# Altium PCB relays.PcbDoc
Units mm, origin at the board's own origin, x right, y up, seen from the top; angles counter-clockwise.
Board outline 114.2 x 71.2 mm, 2 copper layers (Top Layer, Bottom Layer); 37 components, 53 nets, 210 pads, 22 vias.
Unrouted connection lines stored in the file: 26.
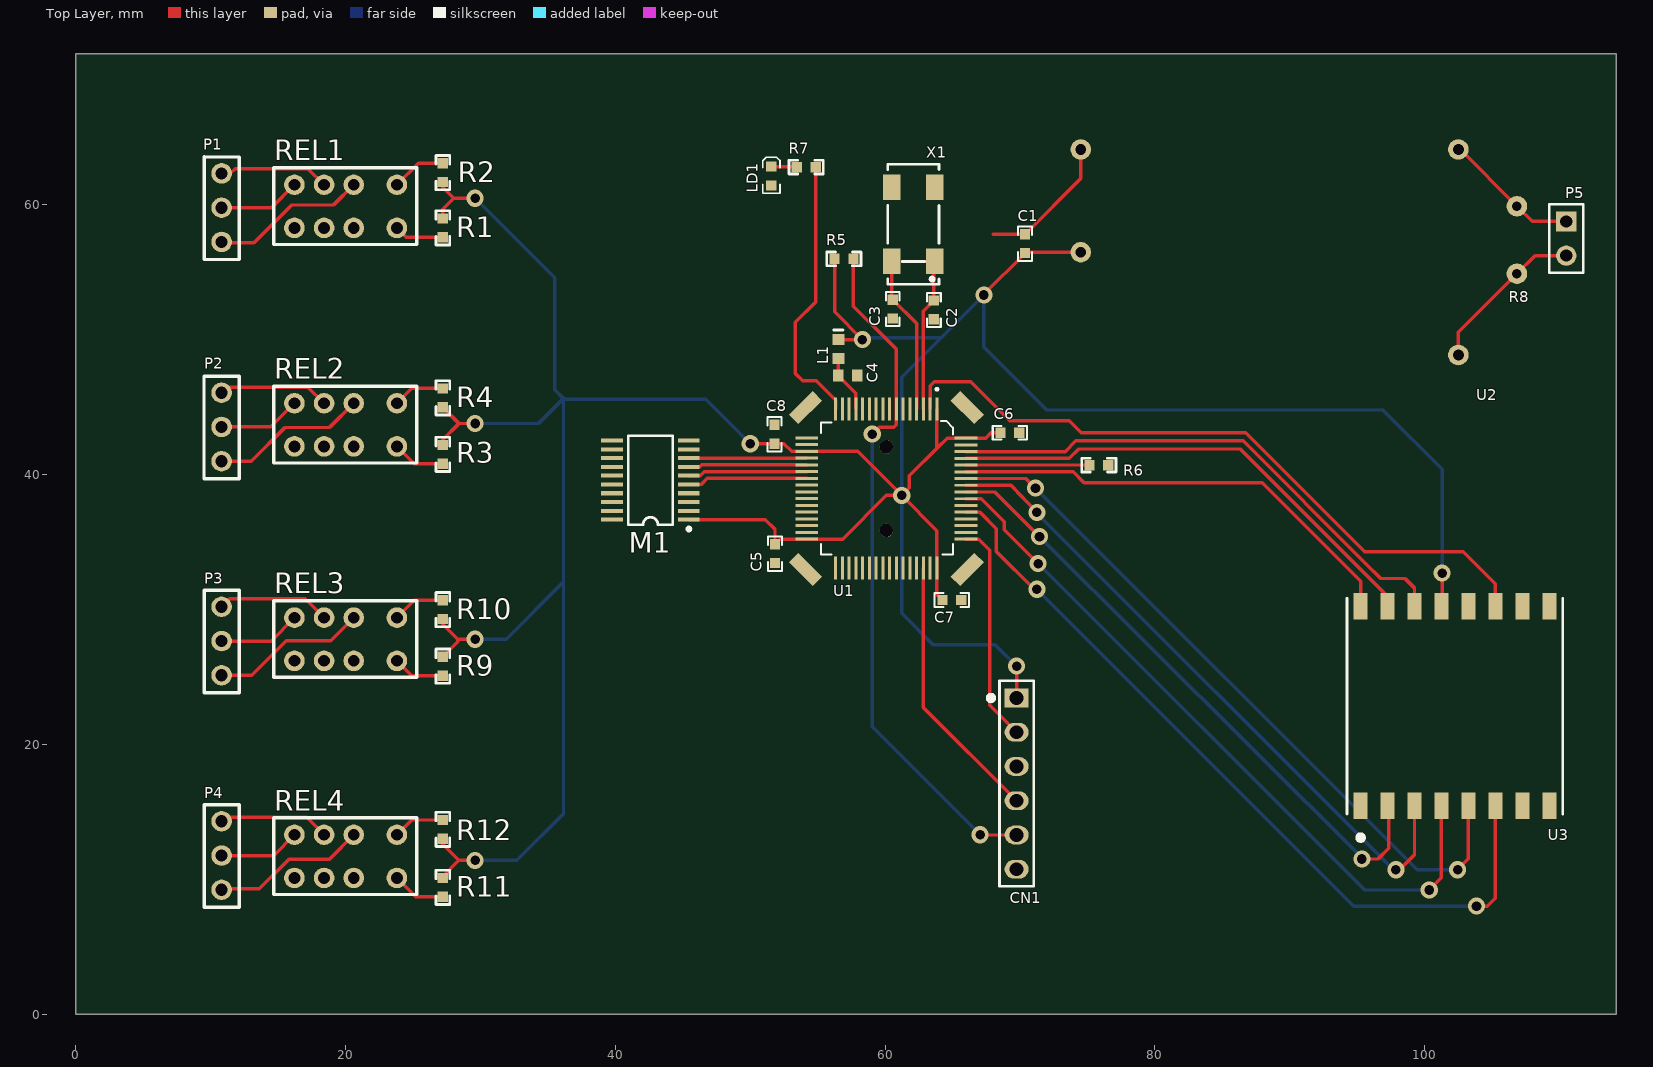
[diagram p0: Top Layer view]
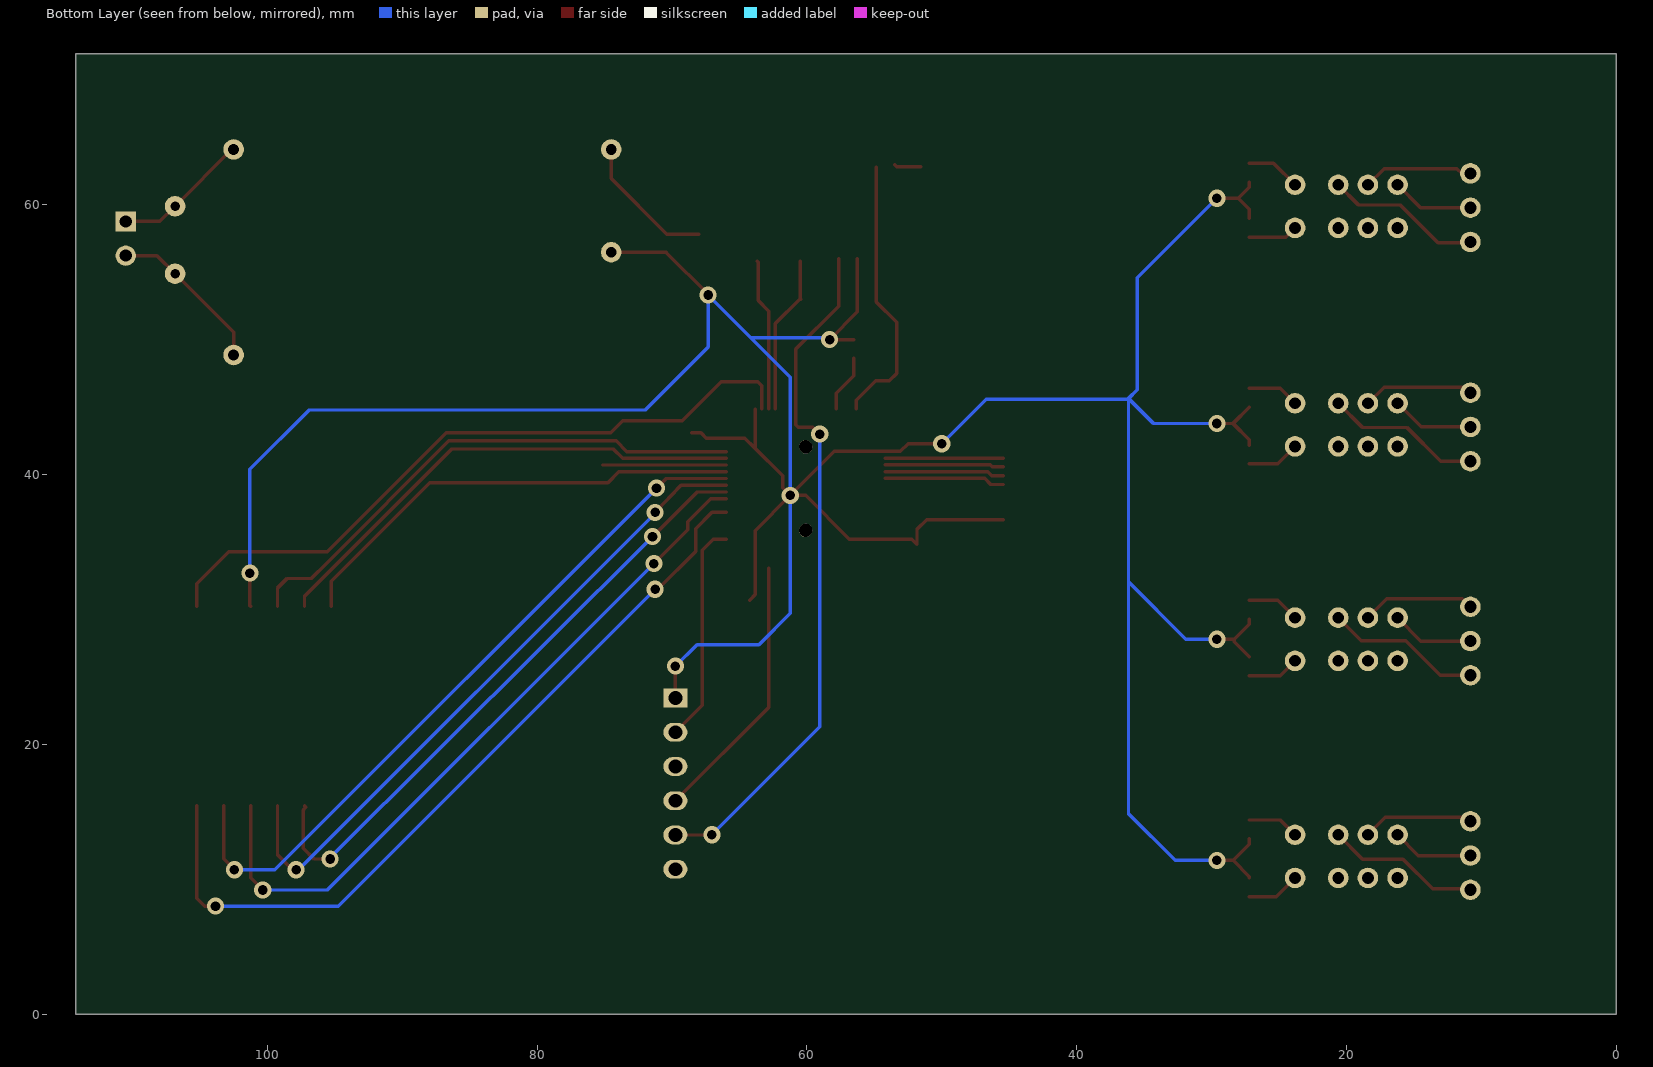
[diagram p1: Bottom Layer view, seen from below]

## Layer stack, top to bottom
Top Solder: solder mask 0.0102, Solder Resist, Dk 3.5
Top Layer: signal copper 0.0356
Dielectric 1: dielectric 0.32, FR-4, Dk 4.8
Bottom Layer: signal copper 0.0356
Bottom Solder: solder mask 0.0102, Solder Resist, Dk 3.5

## Board outline
0,0 114.2,0 114.2,71.2 0,71.2

## Design rules (kind name [scope] priority, off if disabled: settings)
Clearance [All] p1: gap=0.254 ignorepadtopadclearanceinfootprint=FALSE except(0: Arc-Hole Track-Hole SMDPad-Hole THPad-Hole Via-Hole Fill-Hole Poly-Hole Region-Hole Text-Hole; 0.24: Arc-Arc Arc-Track Track-Track)
PolygonConnect [All] p1: connectstyle=Relief reliefconductorwidth=0.254 reliefentries=4 polygonreliefangle="90 Angle" airgapwidth=0.254
RoutingVias [All] p1: holewidth=0.711 width=1.27 viastyle="Through Hole" minholewidth=0.711 minwidth=1.27 maxholewidth=0.711 maxwidth=1.27
SolderMaskExpansion [All] p1: expansion=0.102
Width Width_Power [(InNet('GND') AND InNet('VDD'))] p1: maxlimit=0.5 minlimit=0.25 preferedwidth=0.5
Width [All] p2: maxlimit=0.254 minlimit=0.254 preferedwidth=0.254
30 further rules are at their usual default settings.

## Components (designator, comment, footprint, x,y, rotation, side; value= is the part's Value field where it differs from the comment)
C1 "100nF" 0603C 70.377,57.133 r270 top value=10nF
C2 "10pF[N/A]" 0603C 63.616,52.218 r90 top
C3 "10pF[N/A]" 0603C 60.568,52.282 r90 top
C4 "Cap Semi" 1608[0603] 57.231,47.354 r0 top value=100nF
C5 "100nF" 0603C 51.835,34.146 r90 top value=10nF
C6 "100nF" 0603C 69.252,43.106 r180 top value=10nF
C7 "100nF" 0603C 64.949,30.706 r180 top value=10nF
C8 "100nF" 0603C 51.8,43 r270 top value=10nF
CN1 "Header 6X1" 1*6P 69.75,23.446 r270 top
L1 "Bead" INDC1608L 56.534,49.324 r270 top value=10mH
LD1 "Green" 0603D 51.567,62.149 r90 top
M1 "MAX4821" TSSOP20 42.6,39.6 r90 top
P1 "relay_header_3" relay_header_3 10.8,57.26 r90 top
P2 "relay_header_3" relay_header_3 10.798,41.002 r90 top
P3 "relay_header_3" relay_header_3 10.8,25.126 r90 top
P4 "relay_header_3" relay_header_3 10.8,9.22 r90 top
P5 "Header 2" HDR1X2 110.509,58.784 r270 top
R1 "50" 0603R 27.2,58.3 r90 top value=1K
R2 "50" 0603R 27.2,62.4 r270 top value=1K
R3 "50" 0603R 27.2,41.501 r90 top value=1K
R4 "50" 0603R 27.2,45.7 r270 top value=1K
R5 "4K7" 0603R 56.95,56.006 r0 top value=1K
R6 "4K7" 0603R 75.85,40.706 r0 top value=1K
R7 "510" 0603R 54.15,62.806 r0 top value=1K
R8 "" varistor 106.85,59.906 r270 top value=1K
R9 "50" 0603R 27.2,25.8 r90 top value=1K
R10 "50" 0603R 27.2,30 r270 top value=1K
R11 "50" 0603R 27.2,9.4 r90 top value=1K
R12 "50" 0603R 27.2,13.7 r270 top value=1K
REL1 "AGN21003" AGN21003 23.8,58.3 r180 top
REL2 "AGN21003" AGN21003 23.8,42.1 r180 top
REL3 "AGN21003" AGN21003 23.8,26.2 r180 top
REL4 "AGN21003" AGN21003 23.8,10.1 r180 top
U1 "MCU_LQFP64" LQFP64 60.09,38.972 r180 top
U2 "RAC02-05SGA" RAC02-05SGA 102.508,48.878 r180 top
U3 "RFM95W-868S2" XCVR_RFM95W-868S2 102.254,22.843 r90 top
X1 "32.768K[N/A]" XTAL_4SM_8X3R8 62.092,58.568 r90 top

## Footprints (in the part's own frame and the unit in brackets; to place one, negate y for a bottom-side part, rotate by r counter-clockwise, add the part's x,y. Pads: shape width x height; smd on the part's side, far side on the other; paste and mask are expansions set on the pad)
1*6P [mil]
  rect 55x70 hole 40: 1(0,0)
  oval 55x70 hole 40: 2(100,0) 3(200,0) 4(300,0) 5(400,0) 6(500,0)
  silkscreen extent -50,-82 550,50
0603C [mil]
  rect 30x30 smd: 1(27.5,0) 2(-27.5,0)
  silkscreen extent -50,-20 50,20
0603D [mil]
  rect 30x30 smd: 1(27.5,0) 2(-27.5,0)
  silkscreen extent -50,-25 55,25
0603R [mil]
  rect 30x30 smd: 1(27.5,0) 2(-27.5,0)
  silkscreen extent -50,-20 50,20
1608[0603] [mm] "Chip Capacitor, Body 1.6x0.8mm, IPC High Density"
  rect 0.8x0.9 smd: 1(-0.7,0) 2(0.7,0)
  body extent -0.87,-0.48 0.87,0.48, height 1.3
AGN21003 [mm] "Single coil latching DPDT relay"
  round 1.524 hole 0.87: 1(0,0) 2(3.2,0) 3(5.4,0) 4(7.6,0) 5(7.6,-3.2) 6(5.4,-3.2) 7(3.2,-3.2) 8(0,-3.2)
  silkscreen extent -1.48,-4.47 9.12,1.23
HDR1X2 [mm] "Connector; Header; 2 Position"
  rect 1.5x1.5 hole 0.9: 1(0,0)
  round 1.5 hole 0.9: 2(2.54,0)
  silkscreen extent -1.27,-1.27 3.81,1.27
INDC1608L [mm] "Chip Inductor, Body 1.6x0.8mm, IPC High Density"
  rect 0.8x0.9 smd: 1(-0.7,0) 2(0.7,0)
  silkscreen extent -1.4,-0.35 -1.4,0.35, body extent -0.87,-0.48 0.87,0.48, height 0.55
LQFP64 [mm]
  rect 1x2.5 smd rot 135: 0(-6,6) 0(6,-6)
  rect 1x2.5 smd rot 45: 0(-6,-6) 0(6,6)
  round 1 hole 1 unplated: 0(0,3.1) 0(0,-3.1)
  rect 0.22x1.7 smd: 1(-3.747,-5.901) 2(-3.247,-5.901) 3(-2.747,-5.901) 4(-2.247,-5.901) 5(-1.747,-5.901) 6(-1.247,-5.901) 7(-0.747,-5.901) 8(-0.247,-5.901) 9(0.253,-5.901) 10(0.753,-5.901) 11(1.253,-5.901) 12(1.753,-5.901) 13(2.253,-5.901) 14(2.753,-5.901) 15(3.253,-5.901) 16(3.753,-5.901) 33(3.753,5.902) 34(3.253,5.902) 35(2.753,5.902) 36(2.253,5.902) 37(1.753,5.902) 38(1.253,5.902) 39(0.753,5.902) 40(0.253,5.902) 41(-0.247,5.902) 42(-0.747,5.902) 43(-1.247,5.902) 44(-1.747,5.902) 45(-2.247,5.902) 46(-2.747,5.902) 47(-3.247,5.902) 48(-3.747,5.901)
  rect 1.7x0.22 smd: 17(5.901,-3.753) 18(5.901,-3.253) 19(5.901,-2.753) 20(5.901,-2.253) 21(5.901,-1.753) 22(5.901,-1.253) 23(5.901,-0.753) 24(5.901,-0.253) 25(5.901,0.247) 26(5.901,0.747) 27(5.901,1.247) 28(5.901,1.747) 29(5.901,2.247) 30(5.901,2.747) 31(5.901,3.247) 32(5.901,3.747) 49(-5.902,3.753) 50(-5.902,3.253) 51(-5.902,2.753) 52(-5.902,2.253) 53(-5.902,1.753) 54(-5.902,1.253) 55(-5.902,0.753) 56(-5.902,0.253) 57(-5.902,-0.247) 58(-5.902,-0.747) 59(-5.902,-1.247) 60(-5.902,-1.747) 61(-5.902,-2.247) 62(-5.902,-2.746) 63(-5.902,-3.246) 64(-5.902,-3.746)
  silkscreen extent -4.94,-7.42 4.84,4.89
RAC02-05SGA [mil] "AC/DC converter"
  round 60 hole 31.5: 1(0,0) 2(0,-600) 3(1102.36,-600) 4(1102.36,-300)
relay_header_3 [mil]
  round 60 hole 35.43: 1(0,0) 2(200,0) 3(100,0)
  silkscreen extent -51,-51 249,51
TSSOP20 [mm] "Shrink Small Outline; 20 Leads; Body Width 4.4 mm; Pitch 0.65 mm"
  rect 0.3x1.6 smd: 1(-2.925,-2.85) 2(-2.275,-2.85) 3(-1.625,-2.85) 4(-0.975,-2.85) 5(-0.325,-2.85) 6(0.325,-2.85) 7(0.975,-2.85) 8(1.625,-2.85) 9(2.275,-2.85) 10(2.925,-2.85) 11(2.925,2.85) 12(2.275,2.85) 13(1.625,2.85) 14(0.975,2.85) 15(0.325,2.85) 16(-0.325,2.85) 17(-0.975,2.85) 18(-1.625,2.85) 19(-2.275,2.85) 20(-2.925,2.85)
  silkscreen extent -3.75,-2.97 3.3,1.65
varistor [mil]
  round 60 hole 27.56: 1(0,0) 2(196.85,0)
XCVR_RFM95W-868S2 [mm]
  rect 1.95x1.05 smd: 1(-7.4,7) 2(-7.4,5) 3(-7.4,3) 4(-7.4,1) 5(-7.4,-1) 6(-7.4,-3) 7(-7.4,-5) 8(-7.4,-7) 9(7.4,-7) 10(7.4,-5) 11(7.4,-3) 12(7.4,-1) 13(7.4,1) 14(7.4,3) 15(7.4,5) 16(7.4,7)
  silkscreen extent -10.04,-8 8,8
XTAL_4SM_8X3R8 [mm]
  rect 1.9x1.3 smd: 1(-2.75,-1.6) 2(2.75,-1.6) 3(2.75,1.6) 4(-2.75,1.6)
  silkscreen extent -4.44,-1.91 4.44,1.91

## Part data
C1 C2 C5 C6 C7 C8: library part Cap, "Capacitor"
  C1 C5 C6 C7 C8: Published=8-Jun-2000, Publisher="Altium Limited", Revision="July-2002: Re-released for DXP Platform."
C3: library part CAP, "Capacitor"
C4: "Capacitor (Semiconductor SIM Model)", LatestRevisionDate=29-May-2009, LatestRevisionNote="IPC-7351 Footprint Added.", PackageDescription="Chip Capacitor", PackageReference=C1206, Published=8-Jun-2000, Publisher="Altium Limited"
CN1: "Header, 6-Pin, Single row", LatestRevisionDate=17-Jul-2002, LatestRevisionNote="Re-released for DXP Platform.", Publisher="Altium Limited"
L1: library part Inductor, "Inductor", Code_IEC=1005, Code_JEITA=0402, LatestRevisionDate=29-May-2009, LatestRevisionNote="IPC-7351 Footprint Added.", PackageDescription="Chip Inductor", PackageReference=0402-A, Published=8-Jun-2000, Publisher="Altium Limited"
LD1: library part LED2, "Typical RED, GREEN, YELLOW, AMBER GaAs LED", Published=8-Jun-2000, Publisher="Altium Limited", Revision="July-2002: Re-released for DXP Platform."
P5: "Header, 2-Pin", LatestRevisionDate=17-Jul-2002, LatestRevisionNote="Re-released for DXP Platform.", Publisher="Altium Limited"
R1 R2 R3 R4 R5 R6 R7 R8 R9 R10 R11 R12: library part Res1, "Resistor", Published=8-Jun-2000, Publisher="Altium Limited", Revision="July-2002: Re-released for DXP Platform."
U2: "AC/DC converter"
U3: Package="SMD-16 Hope Microelectronics", Availability=Warning, MF="Hope Microelectronics", MP=RFM95W-868S2, Price="8.44 USD"
X1: library part MC306

## Via types
v1: diameter 1.27, hole 0.711, Top Layer to Bottom Layer, 22 vias

## Nets (pads, with @x,y where several pads share a name; then routed paths per layer and width w, separated by ;. In a path a pad name is that pad's centre, name@x,y a point inside that pad or via, vN(x,y) a via of type N, cw(c..) or ccw(c..) an arc to the next point about the centre after c; other vN are vias at no path point)
GND: C1.2 C2.2 C3.2 C4.2 C5.2 C6.2 C7.2 C8.2 CN1.3 LD1.2 M1.9 M1.12 M1.18 R6.1 U1.12 U1.18 U1.31 U1.47 U1.63 U2.3 U3.1 U3.8 U3.10 | length 10.3
  Top Layer w0.254: 68.028,57.832 C1.2 74.508,61.963 U2.3
NetC2_1: C2.1 U1.3 X1.1 | length 11.3
  Top Layer w0.254: U1.3 62.837,52.137 C2.1 63.616,55.742 X1.1
NetC3_1: C3.1 U1.4 X1.4 | length 11.7
  Top Layer w0.254: C3.1@60.455,53.019 60.492,53.056 X1.4 ; C3.1 62.337,51.211 U1.4
NetC4_1: C4.1 L1.2 U1.13 | length 4.3
  Top Layer w0.254: L1.2 56.531,48.621 C4.1 57.837,46.048 U1.13
NetLD1_1: LD1.1 R7.2 | length 2
  Top Layer w0.254: LD1.1 53.345,62.848 R7.2@53.472,62.975
NetM1_5: M1.5 U1.23 | length 8.9
  Top Layer w0.254: M1.5 46.375,39.275 46.825,39.725 U1.23
NetM1_6: M1.6 U1.22 | length 8.9
  Top Layer w0.254: M1.6 46.3,39.925 46.6,40.225 U1.22
NetM1_7: M1.7 U1.21 | length 8.8
  Top Layer w0.254: M1.7 46.251,40.575 46.402,40.725 U1.21
NetM1_8: M1.8 U1.20 | length 8.7
  Top Layer w0.254: M1.8@45.45,41.225 U1.20
NetM1_16: M1.16 R11.2 REL4.1 | length 4
  Top Layer w0.254: REL4.1 25.198,8.701 R11.2
NetM1_17: M1.17 R9.2 REL3.1 | length 3.9
  Top Layer w0.254: REL3.1 24.898,25.101 R9.2
NetM1_19: M1.19 R3.2 REL2.1 | length 3.9
  Top Layer w0.254: REL2.1 25.097,40.803 R3.2
NetM1_20: M1.20 R1.2 REL1.1 | length 3.7
  Top Layer w0.254: REL1.1 24.499,57.602 R1.2
NetP1_1: P1.1 REL1.7 | length 11.6
  Top Layer w0.254: P1.1 10.86,57.2 13.2,57.2 16,60 19.1,60 REL1.7
NetP1_2: P1.2 REL1.6 | length 8.6
  Top Layer w0.254: P1.2@11.034,62.106 P1.2 11.44,62.34 11.8,62.7 17.2,62.7 REL1.6
NetP1_3: P1.3 REL1.5 | length 6.1
  Top Layer w0.254: P1.3 14.5,59.8 REL1.5
NetP2_1: P2.1 REL2.7 | length 11.8
  Top Layer w0.254: P2.1@10.673,40.877 P2.1 13.002,41.002 15.5,43.5 18.8,43.5 REL2.7
NetP2_2: P2.2 REL2.6 | length 8.4
  Top Layer w0.254: P2.2@10.673,45.957 P2.2 11.216,46.5 17.2,46.5 REL2.6
NetP2_3: P2.3 REL2.5 | length 6.1
  Top Layer w0.254: P2.3 14.441,43.542 REL2.5
NetP3_1: P3.1 REL3.7 | length 11.6
  Top Layer w0.254: P3.1 13.026,25.126 15.6,27.7 18.9,27.7 REL3.7
NetP3_2: P3.2 REL3.6 | length 8.8
  Top Layer w0.254: P3.2@10.55,30.386 10.73,30.206 P3.2 11.394,30.8 17,30.8 REL3.6
NetP3_3: P3.3 REL3.5 | length 6.1
  Top Layer w0.254: P3.3 14.466,27.666 REL3.5
NetP4_1: P4.1 REL4.7 | length 11.8
  Top Layer w0.254: P4.1@10.55,9.026 10.83,9.306 13.606,9.306 15.8,11.5 18.8,11.5 REL4.7
NetP4_2: P4.2 REL4.6 | length 8.3
  Top Layer w0.254: P4.2 11.1,14.6 17.1,14.6 REL4.6
NetP4_3: P4.3 REL4.5 | length 6
  Top Layer w0.254: P4.3 14.66,11.76 REL4.5
NetP5_1: P5.1 R8.1 U2.2 | length 10.4
  Top Layer w0.254: U2.2@102.508,63.928 U2.2 102.638,64.118 R8.1 107.972,58.784 P5.1
NetP5_2: P5.2 R8.2 U2.1 | length 12
  Top Layer w0.254: U2.1 102.508,50.564 R8.2 108.188,56.244 P5.2
NetR2_2: R2.2 REL1.8 | length 4.1
  Top Layer w0.254: REL1.8 25.398,63.098 R2.2
NetR4_2: R4.2 REL2.8 | length 3.9
  Top Layer w0.254: REL2.8 24.898,46.399 R4.2
NetR6_2: R6.2 U1.60 | length 9.2
  Top Layer w0.254: U1.60 R6.2@75.152,40.719
NetR10_2: R10.2 REL3.8 | length 3.9
  Top Layer w0.254: REL3.8 25.099,30.699 R10.2
NetR12_2: R12.2 REL4.8 | length 3.9
  Top Layer w0.254: REL4.8 24.898,14.399 R12.2
NRST: CN1.5 R5.1 U1.7 | length 51.4
  Top Layer w0.254: R5.1 57.649,52.507 60.837,49.319 U1.7 60.837,43.693 60.65,43.506 59.55,43.506 v1(59.05,43.006) ; v1(67.05,13.306) 67.07,13.286 CN1.5
  Bottom Layer w0.254: v1(59.05,43.006) 59.05,21.306 v1(67.05,13.306)
PA2: R7.1 U1.16 | length 20.4
  Top Layer w0.254: R7.1 54.849,52.806 53.35,51.308 53.35,47.506 53.9,46.956 54.9,46.956 56.337,45.519 U1.16
PA3: U1.17
PA8: U1.41
PA9: U1.42
PA10: U1.43
PB3: CN1.6 U1.55 U3.4 | length 53.3
  Top Layer w0.254: U1.55 67.137,38.219 68.85,36.506 68.85,35.906 v1(71.35,33.406) ; v1(100.35,9.206) 101.254,10.11 U3.4
  Bottom Layer w0.254: v1(71.35,33.406) 95.55,9.206 v1(100.35,9.206)
PB4: U1.56 U3.2 | length 47.3
  Top Layer w0.254: U1.56 68.137,38.719 v1(71.45,35.406) v1@71.15,35.406 ; v1(95.35,11.506) 96.55,11.506 97.35,12.306 97.35,15.139 97.15,15.339 U3.2
  Bottom Layer w0.254: v1(71.45,35.406) 95.249,11.707 95.35,11.606 v1(95.35,11.506) 95.65,11.206 v1@95.439,11.406
PB5: U1.57 U3.3 | length 49.6
  Top Layer w0.254: U1.57 69.337,39.219 v1(71.25,37.206) ; v1(97.875,10.706) 97.958,10.706 98.05,10.614 97.95,10.514 97.956,10.508 99.254,11.806 U3.3
  Bottom Layer w0.254: v1(71.25,37.206) 71.25,37.156 97.7,10.706 v1(97.875,10.706)
PB6: U1.58 U3.5 | length 53.5
  Top Layer w0.254: U1.58 70.437,39.719 v1(71.15,39.006) ; v1(102.45,10.706) 103.254,11.51 U3.5
  Bottom Layer w0.254: v1(71.15,39.006) 99.45,10.706 v1(102.45,10.706)
PB7: U1.59 U3.16 | length 34.5
  Top Layer w0.254: U1.59 73.937,40.219 74.75,39.406 87.95,39.406 95.254,32.102 U3.16
PB8: U1.61 U3.15 | length 36.8
  Top Layer w0.254: U1.61 73.663,41.219 74.35,41.906 86.35,41.906 97.254,31.002 U3.15
PB9: U1.62 U3.14 | length 39.5
  Top Layer w0.254: U1.62 73.363,41.719 74.15,42.506 86.55,42.506 95.65,33.406 96.75,32.306 98.55,32.306 99.254,31.602 U3.14
PB11: U1.30
PC6: U1.37
PC9: U1.40
PC12: U1.53 U3.6 | length 59.4
  Top Layer w0.254: U1.53 67.037,37.219 68.25,36.006 68.25,34.306 71.05,31.506 v1(71.25,31.506) ; v1(103.85,8.006) 104.65,8.006 105.254,8.61 U3.6
  Bottom Layer w0.254: v1(71.25,31.506) 94.75,8.006 v1(103.85,8.006)
PC13: U1.2 U3.11 | length 51.6
  Top Layer w0.254: U1.2 63.337,46.593 63.65,46.906 66.35,46.906 69.25,44.006 73.65,44.006 74.55,43.106 86.75,43.106 95.556,34.3 102.856,34.3 105.254,31.902 U3.11
TCK: CN1.2 U1.49 | length 16.4
  Top Layer w0.254: U1.49 66.937,35.219 67.75,34.406 67.75,22.906 CN1.2
TMS: CN1.4 U1.46 | length 20.1
  Top Layer w0.254: U1.46 62.837,22.739 CN1.4
VDD: C1.1 C5.1 C6.1 C7.1 C8.1 CN1.1 L1.1 M1.1 R1.1 R2.1 R3.1 R4.1 R5.2 R9.1 R10.1 R11.1 R12.1 U1.1 U1.19 U1.32 U1.48 U1.64 U2.4 U3.13 | length 273.9
  Top Layer w0.254: R11.1 27.2,10.2 28.4,11.4 ; R12.1 27.2,12.6 28.4,11.4 ; R9.1 28.3,27.598 28.3,27.8 ; R10.1 27.2,28.9 28.3,27.8 ; R3.1 27.2,42.598 28.402,43.8 ; R4.1 28.402,43.8 ; R1.1 27.2,59.7 28,60.5 ; R2.1 27.2,61.3 28,60.5 ; v1(29.6,11.4) 28.4,11.4 ; v1(29.6,27.8) 28.3,27.8 ; v1(29.6,43.8) 28.402,43.8 ; v1(29.6,60.5) 28,60.5 ; M1.1 51.125,36.675 51.835,35.965 C5.1 52.216,35.225 U1.32 56.851,35.225 60.09,38.464 v1(61.233,38.464) ; v1(50,42.3) 50.002,42.302 C8.1 52.499,42.302 53.075,41.725 U1.19 57.972,41.725 v1(61.233,38.464) ; R5.2 56.252,52.082 v1(58.312,50.021) 56.537,50.021 L1.1 ; U1.1 63.837,42.083 63.9,42.02 ; C7.1 63.837,31.12 U1.48 63.837,35.861 v1(61.233,38.464) ; v1(67.329,53.323) 67.329,53.387 C1.1 70.441,56.498 U2.4 ; C6.1 67.85,43.106 67.462,42.718 U1.64 64.598,42.718 63.9,42.02 ; CN1.1 v1(69.75,25.806) ; U3.13 101.3,30.289 v1(101.3,32.7) ; v1(61.233,38.464) 61.805,39.036 61.805,39.925 63.9,42.02
  Bottom Layer w0.254: v1(29.6,11.4) 32.7,11.4 36.15,14.85 36.15,32.05 ; v1(29.6,27.8) 31.9,27.8 36.15,32.05 ; v1(29.6,43.8) 34.3,43.8 36.15,45.65 ; v1(29.6,60.5) 35.5,54.6 35.5,46.3 36.15,45.65 ; v1(50,42.3) 46.7,45.6 36.2,45.6 36.15,45.65 ; v1(58.312,50.021) 58.439,50.148 64.154,50.148 ; v1(69.75,25.806) 68.15,27.406 63.55,27.406 61.233,29.723 v1(61.233,38.464) 61.233,47.227 64.154,50.148 ; v1(101.3,32.7) 101.3,40.4 96.9,44.8 72,44.8 67.329,49.471 v1(67.329,53.323) 64.154,50.148 ; 36.15,32.05 36.15,45.65
pads on no net: M1.2 M1.3 M1.4 M1.10 M1.11 M1.13 M1.14 M1.15 REL1.2 REL1.3 REL1.4 REL2.2 REL2.3 REL2.4 REL3.2 REL3.3 REL3.4 REL4.2 REL4.3 REL4.4 U1.0 U1.5 U1.6 U1.8 U1.9 U1.10 U1.11 U1.14 U1.15 U1.24 U1.25 U1.26 U1.27 U1.28 U1.29 U1.33 U1.34 U1.35 U1.36 U1.38 U1.39 U1.44 U1.45 U1.50 U1.51 U1.52 U1.54 U3.7 U3.9 U3.12 X1.2 X1.3